# Altium PCB PCB.PcbDoc
Units mm, origin at the board's own origin, x right, y up, seen from the top; angles counter-clockwise.
Board outline 54.1 x 36.14 mm, 2 copper layers (Top Layer, Bottom Layer); 25 components, 17 nets, 61 pads, 18 vias.
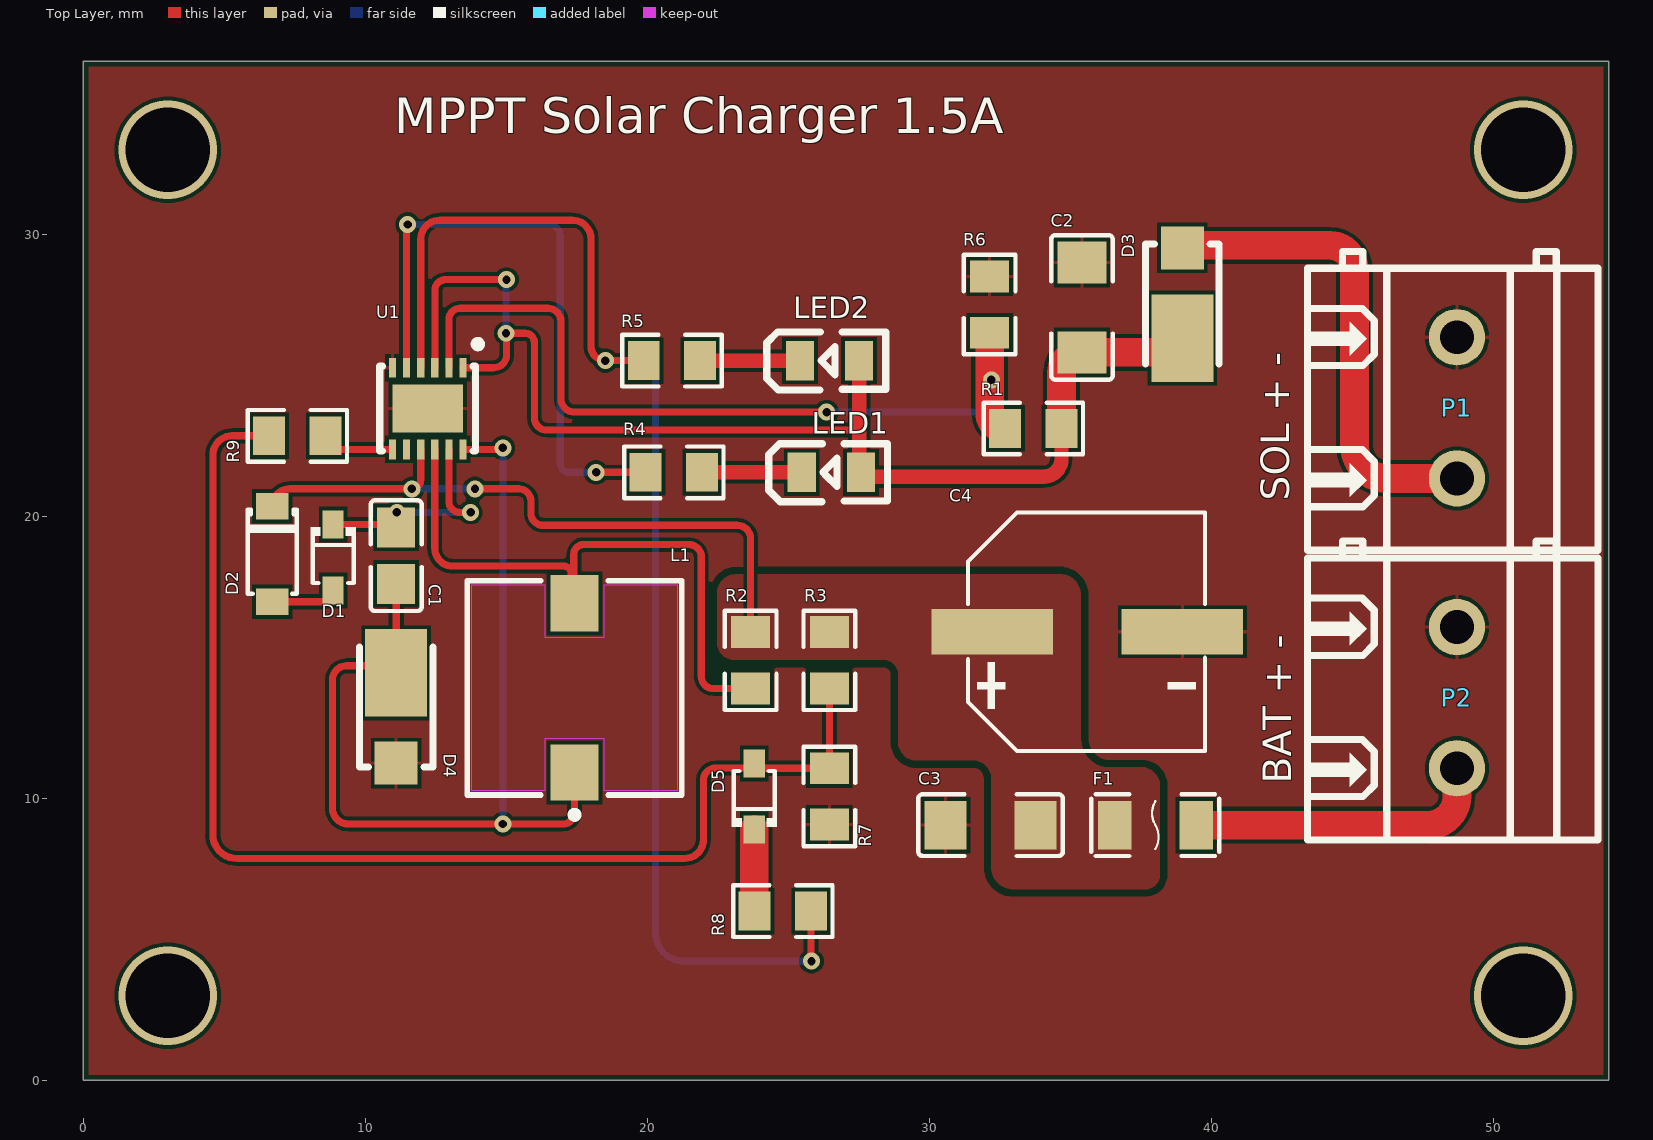
[diagram p0: Top Layer view]
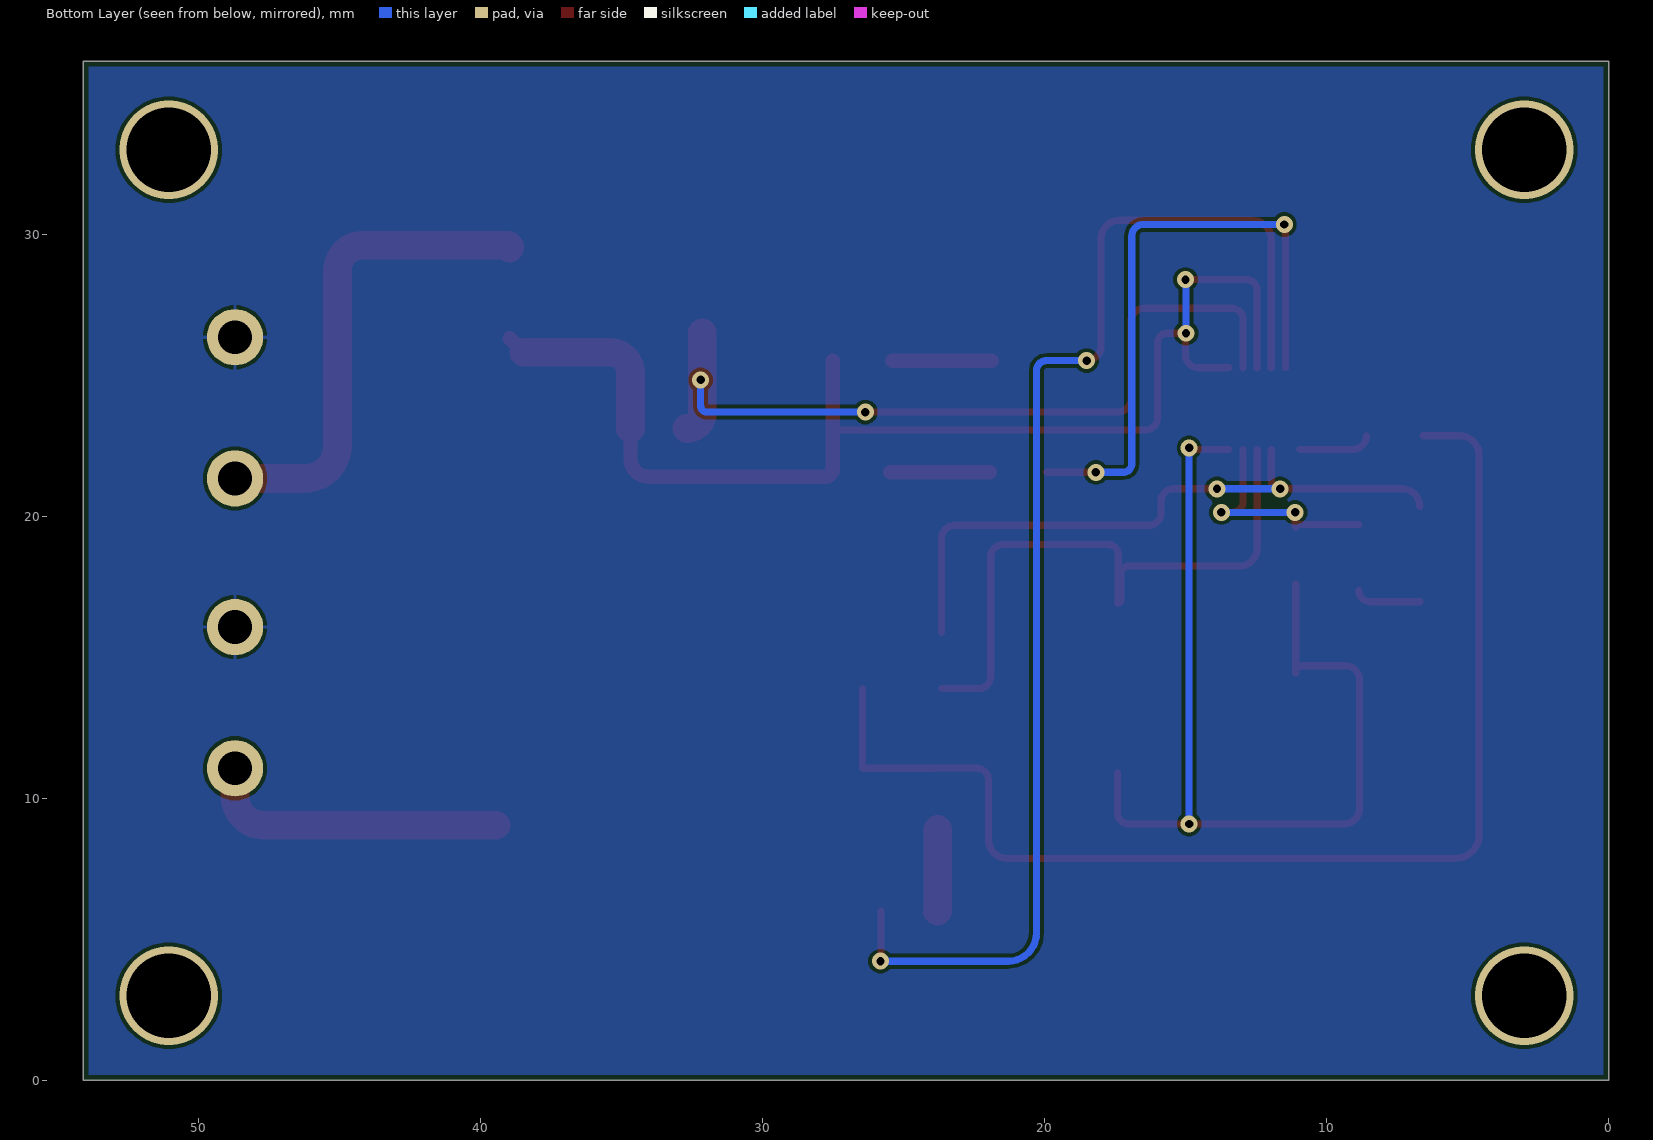
[diagram p1: Bottom Layer view, seen from below]
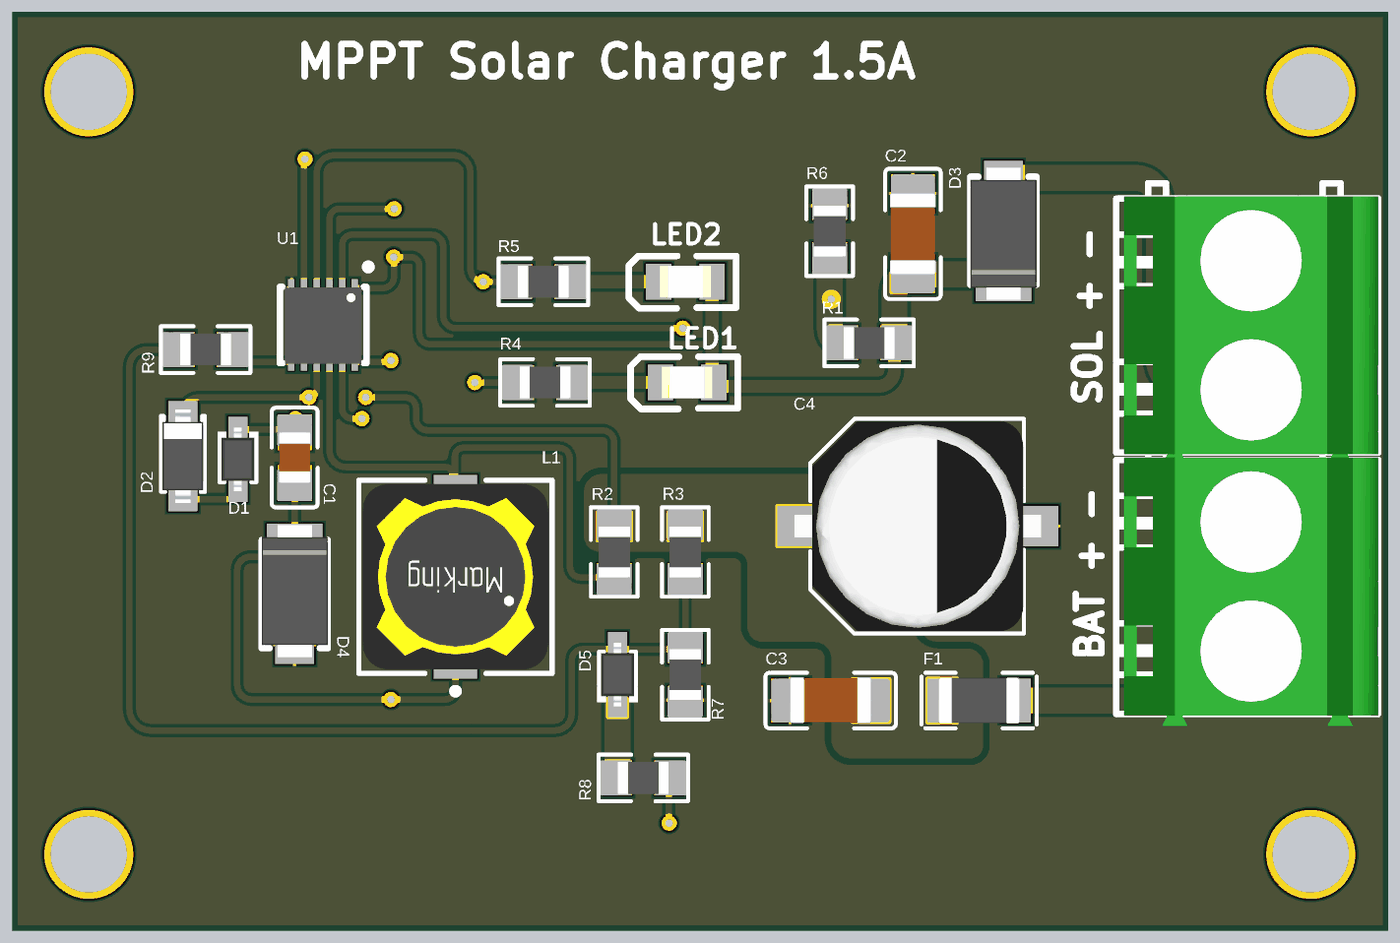
[diagram p2: 3D render of the assembled board from above, using the file's embedded part models]

## Layer stack, top to bottom
Top Solder: solder mask 0.0102, Solder Resist, Dk 3.5
Top Layer: signal copper 0.0356
Dielectric 1: dielectric 0.32, FR-4, Dk 4.8
Bottom Layer: signal copper 0.0356
Bottom Solder: solder mask 0.0102, Solder Resist, Dk 3.5

## Board outline
0,0 54.102,0 54.102,36.144 0,36.144

## Design rules (kind name [scope] priority, off if disabled: settings)
BoardOutlineClearance [All] p1: gap=0.2 ignorepadtopadclearanceinfootprint=FALSE
Clearance [All] p1: gap=0.127 ignorepadtopadclearanceinfootprint=FALSE except(0.25: Arc-Hole Track-Hole SMDPad-Hole THPad-Hole Via-Hole Fill-Hole Poly-Hole Region-Hole Text-Hole; 0.254: Poly-Poly)
ComponentClearance [All] p1: gap=0 collisioncheckmode=3 verticalgap=0 showdistances=FALSE
DiffPairsRouting [All] p1: maxlimit=0.254 minlimit=0.127 mostfreqgap=0.127 toplayer_minwidth=0.127 toplayer_maxwidth=25.4 toplayer_prefwidth=0.127 bottomlayer_minwidth=0.127 bottomlayer_maxwidth=25.4 bottomlayer_prefwidth=0.127 maxuncoupledlength=12.7
Height [All] p1: minheight=0 maxheight=1816.048 prefheight=12.7
HoleSize [All] p1: absolutevalues=TRUE maxlimit=6.3 minlimit=0.3 maxpercent=80.000 minpercent=20.000
HoleToHoleClearance [All] p1: gap=0.25 allowstackedmicrovias=FALSE
MinimumAnnularRing [All] p1: minimumring=0.076
MinimumSolderMaskSliver [All] p1: minsoldermaskwidth=0
PlaneClearance [All] p1: clearance=0.127
PlaneConnect PlaneConnectPowerPads [InPadClass('PowerPads')] p1: planeconnectstyle=Direct reliefexpansion=0.508 reliefentries=4 reliefconductorwidth=0.254 reliefairgap=0.254
PlaneConnect [All] p2: pad.planeconnectstyle=Relief pad.reliefexpansion=0.3 pad.reliefentries=4 pad.reliefconductorwidth=0.127 pad.reliefairgap=0.127 via.planeconnectstyle=Direct via.reliefexpansion=0.3 via.reliefentries=4 via.reliefconductorwidth=0.127 via.reliefairgap=0.127
PolygonConnect PolygonConnect_4 [All vs IsNamedPolygon('NETC3_2_L01_P000')] p1: connectstyle=Direct reliefconductorwidth=0.254 reliefentries=4 polygonreliefangle="90 Angle" airgapwidth=0.254
PolygonConnect PolygonConnect_3 [All vs IsNamedPolygon('GND_L01_P000')] p2: connectstyle=Direct reliefconductorwidth=0.254 reliefentries=4 polygonreliefangle="90 Angle" airgapwidth=0.254
PolygonConnect PolygonConnect_2 [All vs IsNamedPolygon('NETC3_2_L01_P000')] p3: connectstyle=Direct reliefconductorwidth=0.254 reliefentries=4 polygonreliefangle="90 Angle" airgapwidth=0.254
PolygonConnect PolygonConnect_1 [All vs IsNamedPolygon('GND_L01_P000')] p4: connectstyle=Direct reliefconductorwidth=0.254 reliefentries=4 polygonreliefangle="90 Angle" airgapwidth=0.254
PolygonConnect PolygonConnectPowerPads [All vs (InPadClass('PowerPads'))] p5: connectstyle=Direct reliefconductorwidth=0.254 reliefentries=4 polygonreliefangle="90 Angle" airgapwidth=0.254
PolygonConnect [All] p6: thpad.connectstyle=Relief thpad.reliefconductorwidth=0.127 thpad.reliefentries=4 thpad.polygonreliefangle="90 Angle" thpad.airgapwidth=0.127 smdpad.connectstyle=Relief smdpad.reliefconductorwidth=0.127 smdpad.reliefentries=4 smdpad.polygonreliefangle="90 Angle" smdpad.airgapwidth=0.127 via.connectstyle=Direct via.reliefconductorwidth=0.127 via.reliefentries=4 via.polygonreliefangle="90 Angle" via.airgapwidth=0.127
RoutingVias [All] p1: holewidth=0.3 width=0.6 viastyle="Through Hole" minholewidth=0.3 minwidth=0.6 maxholewidth=0.6 maxwidth=6.6
SilkToSilkClearance [All] p1: silktosilkclearance=0
SilkToSolderMaskClearance [IsPad] p1: minsilkscreentomaskgap=0.127 clearancetoexposedcopper=TRUE
SolderMaskExpansion [All] p1: expansion=0.075 istentingtop=FALSE
Width [All] p1: maxlimit=25.4 minlimit=0.127 preferedwidth=0.127 minimp=50.000000 maximp=50.000000 favimp=50.000000
20 further rules are at their usual default settings.

## Components (designator, comment, footprint, x,y, rotation, side; value= is the part's Value field where it differs from the comment)
C1 "1uF" C0805 11.1,18.609 r270 top
C2 "10uF" C1206 35.42,27.413 r90 top
C3 "10uF" C1206 32.178,9.053 r0 top
C4 "100uF" CAP-SMD_BD8.0-L8.3-W8.3-LS9.5-FD 35.607,15.911 r0 top
D1 "1N4148WS-7-F" SOD-323_L1.8-W1.3-LS2.5-RD 8.865,18.542 r270 top
D2 "MMSZ5234BT1G" SOD-123_L2.8-W1.8-LS3.7-RD 6.706,18.669 r270 top
D3 "V8PAL45-M3/I" DO-221BC_L4.3-W2.7-LS5.3-RD 38.976,27.921 r90 top
D4 "V8PAL45-M3/I" DO-221BC_L4.3-W2.7-LS5.3-RD 11.1,12.852 r270 top
D5 "1N4148WS-7-F" SOD-323_L1.8-W1.3-LS2.5-RD 23.796,10.069 r90 top
F1 "0437003.WR" F1206 38.02,9.053 r0 top
L1 "22 μH" WE-PD_7345R 17.424,13.919 r180 top
LED1 "LTST-C170KRKT" LED0805-R-RD 26.534,21.565 r0 top
LED2 "LTST-C170KRKT" LED0805-R-RD 26.467,25.527 r0 top
P1 "WJ128V-5.0-2P" CONN-TH_2P-P5.00_WJ128V-5.0-2P 48.717,23.851 r270 top
P2 "WJ128V-5.0-2P" CONN-TH_2P-P5.00_WJ128V-5.0-2P 48.717,13.574 r270 top
R1 "562kΩ" R0805 33.693,23.12 r0 top
R2 "0.068Ω" R0805 23.669,14.895 r90 top value=0.68Ω
R3 "309kΩ" R0805 26.463,14.895 r90 top
R4 "10kΩ" R0805 20.946,21.565 r0 top
R5 "10kΩ" R0805 20.879,25.527 r0 top
R6 "100kΩ" R0805 32.144,27.514 r270 top
R7 "100kΩ" R0805 26.463,10.069 r90 top
R8 "1MΩ" R0805 24.812,6.005 r180 top
R9 "174kΩ" R0805 7.595,22.86 r180 top
U1 "LT3652EDD#PBF" DFN-12_L3.0-W3.0-P0.50-LS3.0-BL-EP 12.217,23.825 r180 top

## Footprints (in the part's own frame and the unit in brackets; to place one, negate y for a bottom-side part, rotate by r counter-clockwise, add the part's x,y. Pads: shape width x height; smd on the part's side, far side on the other; paste and mask are expansions set on the pad)
C0805 [mm]
  rect 1.41x1.35 smd paste-100 mask+0.051: 1(-1,0) 2(1,0)
  silkscreen extent -1.96,-0.9 1.96,0.9, body extent -1,-0.63 1,0.63, height 0.7
C1206 [mm]
  rect 1.485x1.728 smd paste-100 mask+0.051: 1(-1.593,0) 2(1.593,0)
  silkscreen extent -2.56,-1.09 2.56,1.09, body extent -1.6,-0.89 1.6,0.91, height 1.59
CAP-SMD_BD8.0-L8.3-W8.3-LS9.5-FD [mm]
  rect 4.3x1.6 smd: 1(-3.373,0) 2(3.373,0)
  silkscreen extent -4.23,-4.23 4.18,4.23, body extent -4.85,-4.15 4.85,4.15, height 10.2
CONN-TH_2P-P5.00_WJ128V-5.0-2P [mm]
  round 2 hole 1.2 paste-2539.97 mask+0.051: 1(-2.504,0) 2(2.504,0)
  silkscreen extent -5.55,-5.4 5.05,5, body extent -5.04,-5 5.52,5, height 14.18
DFN-12_L3.0-W3.0-P0.50-LS3.0-BL-EP [mil]
  rect 10x27.6 smd paste+0 mask+2: 1(-49.21,-57) 2(-29.53,-57) 3(-9.84,-57) 4(9.84,-57) 5(29.52,-57) 6(49.21,-57) 7(49.21,57) 8(29.52,57) 9(9.84,57) 10(-9.84,57) 11(-29.53,57) 12(-49.21,57)
  rect 98.42x66.9 smd paste+0 mask+2: 13(0,0)
  silkscreen extent -75,-95 67,59, body extent -59,-58 59,60, height 31
DO-221BC_L4.3-W2.7-LS5.3-RD [mm]
  rect 3.1x2.2 smd: 1(-1.6,0)
  rect 1.52x1.524 smd: 2(1.6,0)
  silkscreen extent -2.51,-1.3 1.74,1.3, body extent -3.1,-1.3 2.1,1.3, height 1
F1206 [mm]
  rect 1.19x1.728 smd: 1(-1.445,0) 2(1.445,0)
  silkscreen extent -2.27,-1.09 2.27,1.09, body extent -1.59,-0.9 1.59,0.9, height 1.52
LED0805-R-RD [mm]
  rect 1x1.4 smd: 1(1.05,0) 2(-1.05,0)
  silkscreen extent -2.22,-1.04 1.99,1.01, body extent -1,-0.63 1,0.63, height 1.1
R0805 [mm]
  rect 1.133x1.377 smd paste-100 mask+0.051: 1(-1,0) 2(1,0)
  silkscreen extent -1.76,-0.92 1.76,0.92, body extent -1,-0.63 1,0.63, height 0.6
SOD-123_L2.8-W1.8-LS3.7-RD [mm]
  rect 0.95x1.15 smd: 1(-1.692,0) 2(1.692,0)
  silkscreen extent -1.58,-0.87 1.41,0.87, body extent -1.84,-0.8 1.84,0.8, height 1.35
SOD-323_L1.8-W1.3-LS2.5-RD [mm]
  rect 1x0.75 smd: 1(-1.173,0) 2(1.173,0)
  silkscreen extent -1.08,-0.8 0.9,0.8, body extent -1.25,-0.65 1.25,0.65, height 1.2
WE-PD_7345R [mm] "SMT Shielded Power Inductor, 2-leads, body 7.3x7.3mm"
  rect 1.7x2 smd: 1(0,3) 2(0,-3)
  Top Layer keep-out region: 3.65,-3.65 1.05,-3.65 1.05,-1.8 -1.05,-1.8 -1.05,-3.65 -3.65,-3.65 -3.65,3.65 -1.05,3.65 -1.05,1.8 1.05,1.8 1.05,3.65 3.65,3.65
  silkscreen extent -3.8,-3.8 3.8,4.62, body extent -3.65,-3.65 3.65,3.65, height 4.1

## Part data
C1: library part GRM216R61E105KA12D, "25V 1uF X5R ±10% 0805 Multilayer Ceramic Capacitors MLCC - SMD/SMT ROHS", JLCPCB Part Class="Extended Part", LCSC Part Name="1uF ±10% 25V", Manufacturer=muRata(村田), Tolerance=±10%, Add into BOM=yes, Convert to PCB=yes, Datasheet=https://atta.szlcsc.com/upload/public/pdf/source/20191022/C440211_D691AF4420B7318595498C3E4B7F2331.pdf, Device=GRM216R61E105KA12D, Manufacturer Part=GRM216R61E105KA12D, Supplier=LCSC, Supplier Footprint=0805, Supplier Part=C440193, Symbol=GRM216R61E105KA12D
C2 C3: library part GRT31CR6YA106KE01L, "35V 10uF X5R ±10% 1206 Multilayer Ceramic Capacitors MLCC - SMD/SMT ROHS", JLCPCB Part Class="Extended Part", LCSC Part Name="10uF ±10% 35V", Manufacturer="Murata Electronics", Tolerance=±10%, Add into BOM=yes, Convert to PCB=yes, Device=GRT31CR6YA106KE01L, Manufacturer Part=GRT31CR6YA106KE01L, Supplier=LCSC, Supplier Footprint=1206, Supplier Part=C2175512, Symbol=GRT31CR6YA106KE01L
C4: library part EEEHC1E101P, "100uF 25V 130mA@120Hz ±20% SMD,D8xL10.2mm Aluminum Electrolytic Capacitors - SMD ROHS", Equivalent Series Resistance(ESR)=-, JLCPCB Part Class="Extended Part", LCSC Part Name="100uF ±20% 25V", Lifetime @ Temp=5000hrs@105℃, Manufacturer=PANASONIC(松下), Operating Temperature=-40℃~+105℃, Ripple Current=130mA@120Hz, Tolerance=±20%, Add into BOM=yes, Convert to PCB=yes, Datasheet=https://atta.szlcsc.com/upload/public/pdf/source/20190305/C336336_78C21C8ECF10E68AF1E1A1FAA303815A.pdf, Device=EEEHC1E101P, Manufacturer Part=EEEHC1E101P, Supplier=LCSC, Supplier Footprint=SMD,D8xL10.2mm, Supplier Part=C336335, Symbol=EEEHC1E101P
D1 D5: "75V Independent Type 1.25V@150mA 4ns 150mA SOD-323 Switching Diodes ROHS", Forward Voltage (Vf@If)=1.25V@150mA, JLCPCB Part Class="Extended Part", LCSC Part Name="电压:75V 电流:150mA", Manufacturer=DIODES(美台), Operating Temperature=-65℃~+150℃@(Tj), Reverse Leakage Current=1uA@75V, Add into BOM=yes, Convert to PCB=yes, Datasheet=https://atta.szlcsc.com/upload/public/pdf/source/20160107/1457707747110.pdf, Device=1N4148WS-7-F, Diode Configuration="Independent Type", Manufacturer Part=1N4148WS-7-F, Supplier=LCSC, Supplier Footprint=SOD-323, Supplier Part=C60580, Symbol=1N4148WS-7-F
D2: "Independent Type 5.89V~6.51V 500mW 6.2V SOD-123 Zener Diodes ROHS", JLCPCB Part Class="Extended Part", Manufacturer=onsemi(安森美), Pd - Power Dissipation(Pd)=500mW, Reverse Leakage Current (Ir)=5uA@4V, Zener Voltage(Nom)=6.2V, Zener Voltage(Range)=5.89V~6.51V, Add into BOM=yes, Convert to PCB=yes, Datasheet=https://atta.szlcsc.com/upload/public/pdf/source/20221020/24E30AC3B161AD81AE78606E4A7F6AC2.pdf, Device=MMSZ5234BT1G, Diode Configuration="Independent Type", Impedance(Zzt)=7Ω, LCSC Part Name=MMSZ5234BT1G, Manufacturer Part=MMSZ5234BT1G, Supplier=LCSC, Supplier Footprint=SOD-123, Supplier Part=C194181, Symbol=MMSZ5234BT1G
D3 D4: "45V 4A 570mV@8A DO-221BC(SMPA) Schottky Diodes ROHS", Forward Voltage (Vf@If)=570mV@8A, JLCPCB Part Class="Extended Part", LCSC Part Name="电压:45V 电流:4A", Manufacturer=VISHAY(威世), Rectified Current=4A, Reverse Leakage Current (Ir)=1.85mA@45V, Reverse Voltage (Vr)=45V, Add into BOM=yes, Convert to PCB=yes, Datasheet=https://atta.szlcsc.com/upload/public/pdf/source/20231212/E8913B3A928D0C347C4F04EA6F9113F3.pdf, Device=V8PAL45-M3/I, Manufacturer Part=V8PAL45-M3/I, Supplier=LCSC, Supplier Footprint=DO-221BC(SMPA), Supplier Part=C3759194, Symbol=V8PAL45-M3/I
F1: library part Fuse, "50A SMD Fuse 3A 32V 1206 Disposable fuses ROHS", Breaking Capacity=50A, Current Rating=3A, JLCPCB Part Class="Extended Part", LCSC Part Name=32V贴片式保险丝, Manufacturer=Littelfuse(美国力特), Operating Temperature=-55℃~+150℃, Voltage Rating  (AC)=32V, Voltage Rating (DC)=35V, Add into BOM=yes, Convert to PCB=yes, Datasheet=https://atta.szlcsc.com/upload/public/pdf/source/20170322/1490151740362.pdf, Device=0437003.WR, Manufacturer Part=0437003.WR, Supplier=LCSC, Supplier Footprint=1206, Supplier Part=C99539, Symbol=0437003.WR, Type="SMD Fuse"
L1: library part 7447779122, "WE-PD SMT Power Inductor, size 7345R, 22 μH, 1.41 A, 110 mΩ", Case/Size Code=7345R, DC Resistance="90 mΩ", DC Resistance Max="110 mΩ", Manufacturer="Wurth Elektronik", Max Operating Temperature="125 °C", Min Operating Temperature="-40 °C", Rated Current="1.41 A", Saturation Current="1.7 A", Self Resonant Frequency="17 MHz", Category="Power Inductors", ComponentLink1Description="Website Link", ComponentLink1URL=https://www.we-online.com/redexpert/article/7447779122?ad, ComponentLink2Description="Datasheet Link", ComponentLink2URL=https://www.we-online.com/redexpert/spec/7447779122?ad, Height="4.5 mm", Inductance="22 μH", Length="7.3 mm", Manufacturer Part Number=7447779122, Match Code=WE-PD, Mount="Surface Mount", Packaging="Tape and Reel", Type=Robust, Width="7.3 mm"
LED1 LED2: "20mA 54mcd Colorless Transparent Lens -55℃~+85℃ 631nm Red 130° 75mW 2V 0805 LED Indication - Discrete ROHS", Color Temperature=-, Emitted Color=Red, Forward Current=20mA, Forward Voltage (VF)=2V, JLCPCB Part Class="Extended Part", Lens Color="Colorless Transparent Lens", Manufacturer=LITEON(光宝), Operating Temperature=-55℃~+85℃, Power Dissipation=75mW, Add into BOM=yes, Convert to PCB=yes, Datasheet=https://atta.szlcsc.com/upload/public/pdf/source/20170325/1490427902593.pdf, Device=LTST-C170KRKT, Diode Configuration=-, Dominant Wavelength=631nm, LCSC Part Name=LTST-C170KRKT, Luminous Intensity=54mcd, Manufacturer Part=LTST-C170KRKT, Mounting Sytle=-, Peak Wavelength=639nm, Supplier=LCSC, Supplier Footprint=0805, Supplier Part=C94868, Symbol=LTST-C170KRKT, Viewing Angle=130°
P1 P2: "1x2P 20A -40℃~+105℃ 250V Green 12~22 Direct Insert 5mm 2.5 1 2 Plugin,P=5mm Screw Terminal Blocks ROHS", JLCPCB Part Class="Extended Part", Manufacturer=KANGNEX(康奈克斯电气), Manufacturer Part=WJ128V-5.0-2P, spicePre=P, spiceSymbolName=WJ128V-5.0-2P, Supplier=LCSC, Supplier Part=C8269
R1: library part ERJ6ENF5623V, "0.125W Thick Film Resistors ±100ppm/℃ ±1% 562kΩ 0805 Chip Resistor - Surface Mount ROHS", JLCPCB Part Class="Extended Part", Manufacturer=PANASONIC(松下), Contributor=LCSC, Manufacturer Part=ERJ6ENF5623V, nameAlias=Value, spicePre=R, spiceSymbolName=ERJ6ENF5623V, Supplier=LCSC, Supplier Part=C3025620
R2: library part FRL0805JR068TS, "0.125W Thick Film Resistors 300V ±600ppm/℃ ±5% 0.068Ω 0805 Chip Resistor - Surface Mount ROHS", JLCPCB Part Class="Extended Part", LCSC Part Name=C3000696, Manufacturer=FOJAN, Operating Temperature Range=-55℃~+155℃, Overload Voltage (Max)=-, Temperature Coefficient=±200ppm/℃, Tolerance=±1%, Add into BOM=yes, Convert to PCB=yes, Device=FRL0805JR068TS, Manufacturer Part=FRL0805JR068TS, Supplier=LCSC, Supplier Footprint=0805, Supplier Part=C3000696, Symbol=FRL0805JR068TS, Type="Thick Film Resistors"
R3: library part ERJ6ENF3093V, "309kΩ 0805 Chip Resistor 0.125W Thick Film Resistors ±100ppm/℃ ±1%  - Surface Mount ROHS", JLCPCB Part Class="Extended Part", LCSC Part Name="309kΩ ±1% 125mW 厚膜电阻", Manufacturer=PANASONIC(松下), Operating Temperature Range=-55℃~+155℃, Overload Voltage (Max)=-, Temperature Coefficient=±100ppm/℃, Tolerance=±1%, Add into BOM=yes, Convert to PCB=yes, Datasheet=https://atta.szlcsc.com/upload/public/pdf/source/20190806/C410005_411FBB62F8BDC8BC9CE172F2BD7302D6.pdf, Device=ERJ6ENF3093V, Manufacturer Part=ERJ6ENF3093V, Supplier=LCSC, Supplier Footprint=0805, Supplier Part=C410005, Symbol=ERJ6ENF3093V, Type="Thick Film Resistors"
R4 R5: library part ERJPB6B1002V, "10kΩ 0805 Chip Resistor  0.2W Thick Film Resistors 200V ±50ppm/℃ ±0.1% - Surface Mount ROHS", JLCPCB Part Class="Extended Part", LCSC Part Name="10kΩ ±0.1% 200mW 厚膜电阻", Manufacturer=PANASONIC(松下), Operating Temperature Range=-55℃~+155℃, Temperature Coefficient=±50ppm/℃, Tolerance=±0.1%, Add into BOM=yes, Convert to PCB=yes, Datasheet=https://atta.szlcsc.com/upload/public/pdf/source/20180416/C191317_151B7FE0B8A326015C369A5828110A93.pdf, Device=ERJPB6B1002V, Manufacturer Part=ERJPB6B1002V, Supplier=LCSC, Supplier Footprint=0805, Supplier Part=C161788, Symbol=ERJPB6B1002V, Type="Thick Film Resistors"
R6 R7: library part ERJ6ENF1003V, "100kΩ 0805 Chip Resistor 0.125W Thick Film Resistors ±100ppm/℃ ±1%  - Surface Mount ROHS", JLCPCB Part Class="Extended Part", LCSC Part Name="100kΩ ±1% 125mW 厚膜电阻", Manufacturer=PANASONIC(松下), Operating Temperature Range=-55℃~+155℃, Overload Voltage (Max)=-, Temperature Coefficient=±100ppm/℃, Tolerance=±1%, Add into BOM=yes, Convert to PCB=yes, Datasheet=https://atta.szlcsc.com/upload/public/pdf/source/20181222/C169252_7F18A762E4E3D9CA9CBEEE198C53D3F1.pdf, Device=ERJ6ENF1003V, Manufacturer Part=ERJ6ENF1003V, Supplier=LCSC, Supplier Footprint=0805, Supplier Part=C169252, Symbol=ERJ6ENF1003V, Type="Thick Film Resistors"
R8: library part ERJP06J105V, "1MΩ 0805 Chip Resistor  0.5W Thick Film Resistors ±5% ±200ppm/℃ - Surface Mount ROHS", JLCPCB Part Class="Extended Part", LCSC Part Name="1MΩ ±5% 500mW 厚膜电阻", Manufacturer=PANASONIC(松下), Operating Temperature Range=-55℃~+155℃, Overload Voltage (Max)=-, Temperature Coefficient=±200ppm/℃, Tolerance=±5%, Add into BOM=yes, Convert to PCB=yes, Device=ERJP06J105V, Manufacturer Part=ERJP06J105V, Supplier=LCSC, Supplier Footprint=0805, Supplier Part=C441966, Symbol=ERJP06J105V, Type="Thick Film Resistors"
R9: library part ERJ6ENF1743V, "174kΩ 0805 Chip Resistor  0.125W Thick Film Resistors ±100ppm/℃ ±1% - Surface Mount ROHS", JLCPCB Part Class="Extended Part", Manufacturer=PANASONIC(松下), Contributor=LCSC, Manufacturer Part=ERJ6ENF1743V, nameAlias=Value, spicePre=R, spiceSymbolName=ERJ6ENF1743V, Supplier=LCSC, Supplier Part=C409978
U1: "4.95V~32V Multi-Chemical 1~4 2A DFN-12(3x3) Battery Management ROHS", JLCPCB Part Class="Extended Part", Manufacturer=ADI(亚德诺), Manufacturer Part=LT3652EDD#PBF, spicePre=U, spiceSymbolName=LT3652EDD#PBF, Supplier=LCSC, Supplier Part=C96510

## Via types
v1: diameter 0.6, hole 0.3, Top Layer to Bottom Layer, 14 vias
v2: diameter 3.5, hole 3, Top Layer to Bottom Layer, 4 vias

## Nets (pads, with @x,y where several pads share a name; then routed paths per layer and width w, separated by ;. In a path a pad name is that pad's centre, name@x,y a point inside that pad or via, vN(x,y) a via of type N, cw(c..) or ccw(c..) an arc to the next point about the centre after c; other vN are vias at no path point)
GND: C2.2 C3.1 C4.2 D4.2 P1.1 P2.1 R6.1 R7.1 U1.6 U1.13
NetC1_1: C1.1 D1.1 U1.11 | length 8.3
  Top Layer w0.254: D1.1 10.994,19.715 cw(c10.994,19.609) C1.1 11.125,19.634 v1(11.125,20.142) ; U1.11 12.967,20.535 ccw(c13.36,20.535) 13.36,20.142 v1(13.741,20.142)
  Bottom Layer w0.254: v1(11.125,20.142) v1(13.741,20.142)
NetC1_2: C1.2 D4.1 L1.1 U1.12 | length 35.7
  Top Layer w0.254: C1.2 D4.1 ccw(c10.846,14.452) 10.846,14.707 9.347,14.707 ccw(c9.347,14.199) 8.839,14.199 8.839,9.652 ccw(c9.398,9.652) 9.398,9.093 v1(14.884,9.093) 17.018,9.093 ccw(c17.018,9.5) 17.424,9.5 L1.1 ; U1.12 14.834,22.377 ccw(c14.834,22.428) v1(14.884,22.428)
  Bottom Layer w0.254: v1(14.884,9.093) v1(14.884,22.428)
NetC2_1: C2.1 D3.1 LED1.1 LED2.1 R1.2 U1.1 U1.3 | length 45.2
  Top Layer w0.254: U1.3 12.471,25.273 12.471,28.016 cw(c12.852,28.016) 12.852,28.397 v1(15.011,28.397) ; U1.1 14.554,25.273 ccw(c14.554,25.73) 15.011,25.73 15.011,26.492 14.994,26.492 v1(14.994,26.498) 15.666,26.498 cw(c15.666,26.162) 16.002,26.162 16.002,23.495 ccw(c16.434,23.495) 16.434,23.063 27.466,23.063 ccw(c27.466,23.114) 27.517,23.114
  Top Layer w0.508: LED2.1 27.517,23.114 27.517,21.632 ccw(c27.584,21.632) LED1.1 ccw(c27.737,21.565) 27.737,21.412 34.061,21.412 ccw(c34.061,22.044) 34.693,22.044 R1.2 ; D3.1@38.476,25.82 D3.1
  Top Layer w1.016: R1.2 34.693,25.093 cw(c35.42,25.093) C2.1 D3.1@38.476,25.82
  Bottom Layer w0.254: v1(14.994,26.498) 14.994,28.397 v1(15.011,28.397)
NetC3_2: C3.2 C4.1 D2.1 F1.1 R2.2 R3.2 U1.9 | length 23.4
  Top Layer w0.254: D2.1 cw(c7.325,20.361) 7.325,20.98 v1(11.659,20.98) ccw(c11.659,21.289) 11.967,21.289 U1.9 ; v1(13.894,20.98) 15.443,20.98 cw(c15.443,20.549) 15.875,20.549 15.875,20.117 ccw(c16.307,20.117) 16.307,19.685 23.19,19.685 cw(c23.19,19.206) 23.669,19.206 R2.2
  Bottom Layer w0.254: v1(11.659,20.98) v1(13.894,20.98)
NetD1_2: D1.2 D2.2 | length 2.4
  Top Layer w0.254: D2.2 8.472,16.977 ccw(c8.472,17.369) D1.2
NetD3_2: D3.2 P1.2 | length 17.2
  Top Layer w1.016: D3.2 cw(c39.072,29.521) 39.072,29.616 44.196,29.616 cw(c44.196,28.727) 45.085,28.727 45.085,22.504 ccw(c46.243,22.504) 46.243,21.346 P1.2
NetD5_1: D5.1 R8.2 | length 2.9
  Top Layer w1.016: D5.1 23.796,6.005 R8.2
NetD5_2: D5.2 R3.1 R7.2 R9.2 | length 43.8
  Top Layer w0.254: R9.2 5.283,22.86 ccw(c5.283,22.174) 4.597,22.174 4.597,8.712 ccw(c5.436,8.712) 5.436,7.874 21.336,7.874 ccw(c21.336,8.534) 21.996,8.534 21.996,10.643 cw(c22.428,10.643) 22.428,11.074 23.968,11.074 23.968,11.069 R7.2 R3.1
NetF1_2: F1.2 P2.2 | length 10.8
  Top Layer w1.016: F1.2 47.701,9.053 ccw(c47.701,10.069) 48.717,10.069 P2.2
NetL1_2: L1.2 R2.1 U1.10 | length 22.9
  Top Layer w0.254: U1.10 12.467,18.876 ccw(c13.106,18.876) 13.106,18.237 17.043,18.237 cw(c17.043,17.983) 17.297,17.983 17.297,17.046 ccw(c17.424,17.046) L1.2 cw(c17.424,16.945) 17.399,16.945 17.399,18.669 cw(c17.729,18.669) 17.729,18.999 21.488,18.999 cw(c21.488,18.567) 21.92,18.567 21.92,14.326 ccw(c22.35,14.326) 22.35,13.895 R2.1
NetLED1_2: LED1.2 R4.2 | length 3.5
  Top Layer w0.508: R4.2 LED1.2
NetLED2_2: LED2.2 R5.2 | length 3.5
  Top Layer w0.508: R5.2 LED2.2
NetR1_1: R1.1 R6.2 U1.2 | length 29.2
  Top Layer w0.254: U1.2 12.967,26.988 cw(c13.36,26.988) 13.36,27.381 16.485,27.381 cw(c16.485,26.924) 16.942,26.924 16.942,24.181 ccw(c17.424,24.181) 17.424,23.698 v1(26.365,23.698)
  Top Layer w1.016: R6.2 32.144,23.67 ccw(c32.693,23.67) R1.1
  Bottom Layer w0.254: v1(26.365,23.698) 31.979,23.698 ccw(c31.979,23.927) 32.207,23.927 v1(32.207,24.841)
NetR4_1: R4.1 U1.5 | length 22
  Top Layer w0.254: U1.5 11.467,30.219 cw(c11.721,30.218) v1(11.506,30.353) ; v1(18.186,21.565) R4.1
  Bottom Layer w0.254: v1(11.506,30.353) 16.51,30.353 cw(c16.51,29.947) 16.916,29.947 16.916,21.869 ccw(c17.221,21.869) 17.221,21.565 v1(18.186,21.565)
NetR5_1: R5.1 R8.1 U1.4 | length 47.1
  Top Layer w0.254: U1.4 11.967,29.824 cw(c12.649,29.824) 12.649,30.505 17.348,30.505 cw(c17.348,29.845) 18.009,29.845 18.009,26.035 ccw(c18.517,26.035) v1(18.517,25.527) R5.1 ; R8.1 25.812,4.227 v1(25.828,4.227)
  Bottom Layer w0.254: v1(18.517,25.527) 19.939,25.527 cw(c19.939,25.171) 20.295,25.171 20.295,5.232 ccw(c21.3,5.232) 21.3,4.227 v1(25.828,4.227)
NetR9_1: R9.1 U1.7 | length 2.6
  Top Layer w0.254: R9.1 ccw(c9.077,22.86) 9.077,22.377 U1.7
pads on no net: U1.8
copper on no net:
  other v2: 3,3 51.064,3 3,33 51.064,33

## Polygon pours and split planes (outlines as drawn)
GND on Top Layer "GND_L01_P002" (solid, pour order 2): 0,36.144 54.102,36.144 54.102,0 0,0
NetC3_2 on Top Layer "NETC3_2_L01_P000" (solid, pour order 0): 37.541,11.1 36.398,11.1 cw(c36.398,12.116) 35.382,12.116 35.382,17.196 ccw(c34.62,17.196) 34.62,17.958 23.165,17.958 ccw(c23.165,17.272) 22.479,17.272 22.479,15.545 ccw(c23.114,15.545) 23.114,14.91 28.397,14.91 cw(c28.397,14.402) 28.905,14.402 28.905,11.989 ccw(c29.54,11.989) 29.54,11.354 31.572,11.354 cw(c31.572,10.719) 32.207,10.719 32.207,7.544 ccw(c32.969,7.544) 32.969,6.782 37.668,6.782 ccw(c37.668,7.29) 38.176,7.29 38.176,10.084 38.176,10.465 ccw(c37.541,10.465)
GND on Bottom Layer "GND_L02_P001" (solid, pour order 1): 0,36.144 54.102,36.144 54.102,0 0,0

## Silkscreen, mask and mechanical layers (free items; w line width, h text height)
Top Overlay:
  text "MPPT Solar Charger 1.5A" at 11.024,33.596 h1.27
  text "SOL + -" at 42.774,20.549 h1.02 r90
  text "BAT + -" at 42.85,10.516 h1.02 r90